# Altium PCB NFC.PcbDoc
Units mil, origin at the board's own origin, x right, y up, seen from the top; angles counter-clockwise.
Board outline 2130 x 3380 mil, 4 copper layers (Top Layer, Layer 1, Layer 2, Bottom Layer), stack 28.394 mil thick; 12 components, 11 nets, 35 pads, 7 vias.
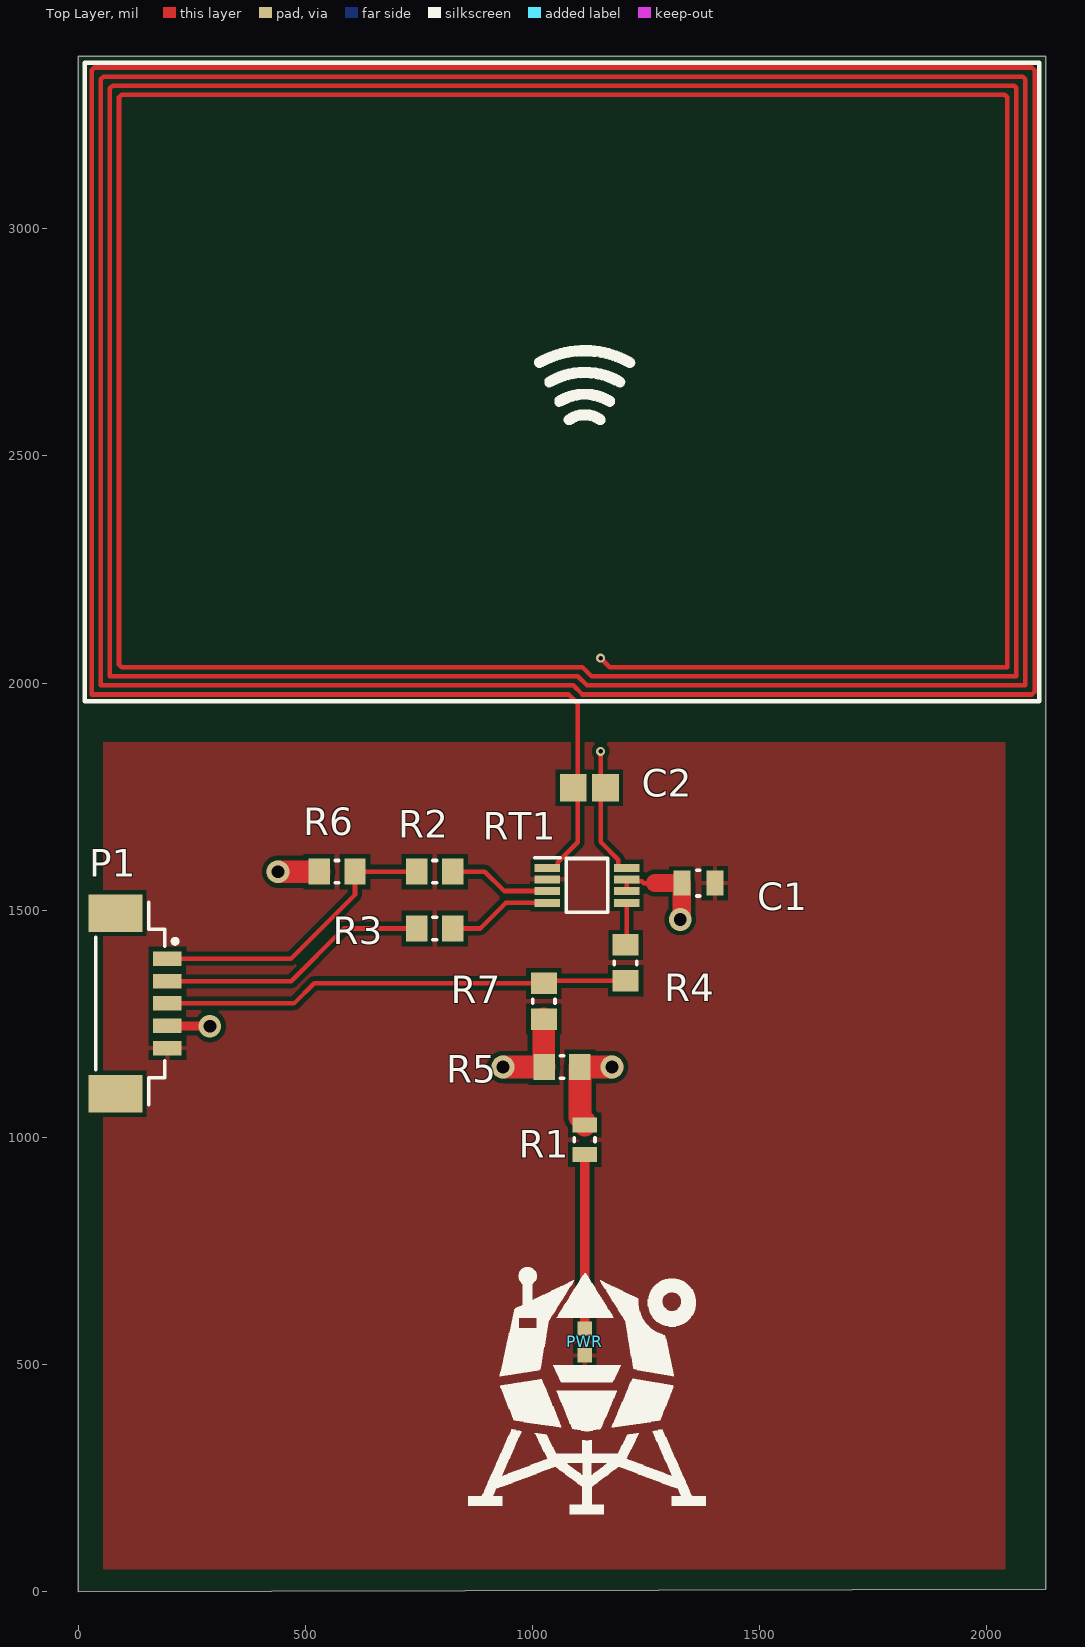
[diagram p0: Top Layer view]
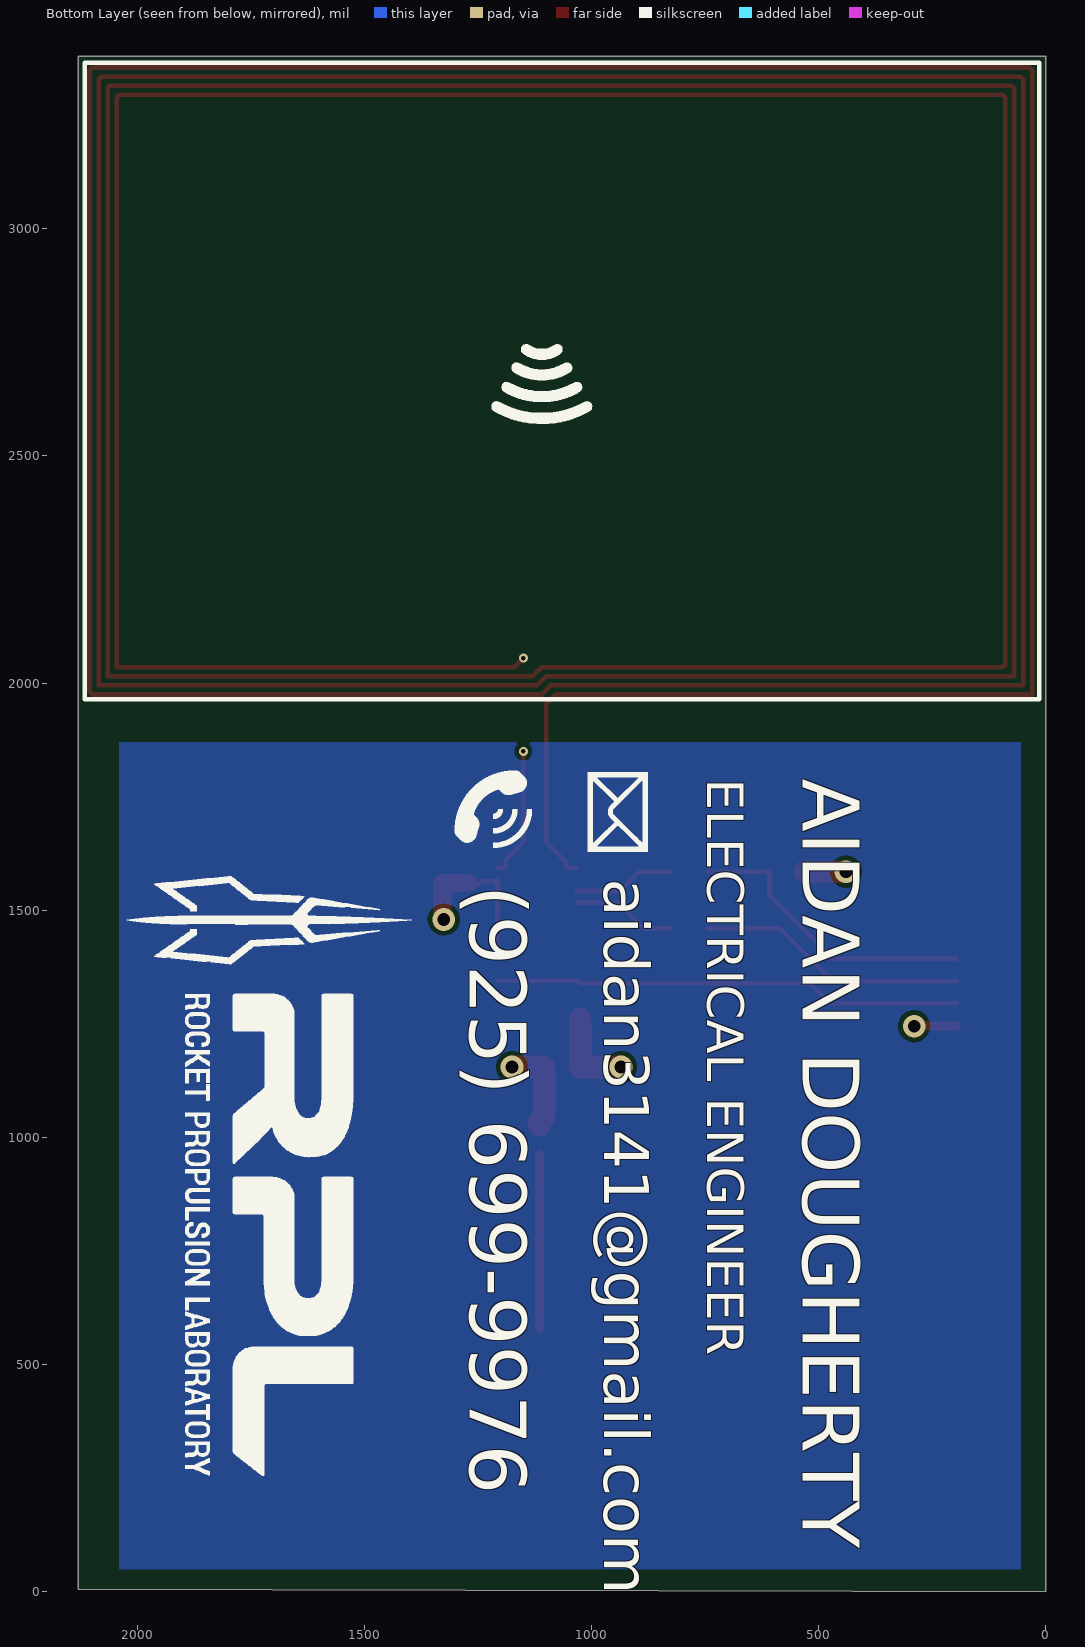
[diagram p1: Bottom Layer view, seen from below]
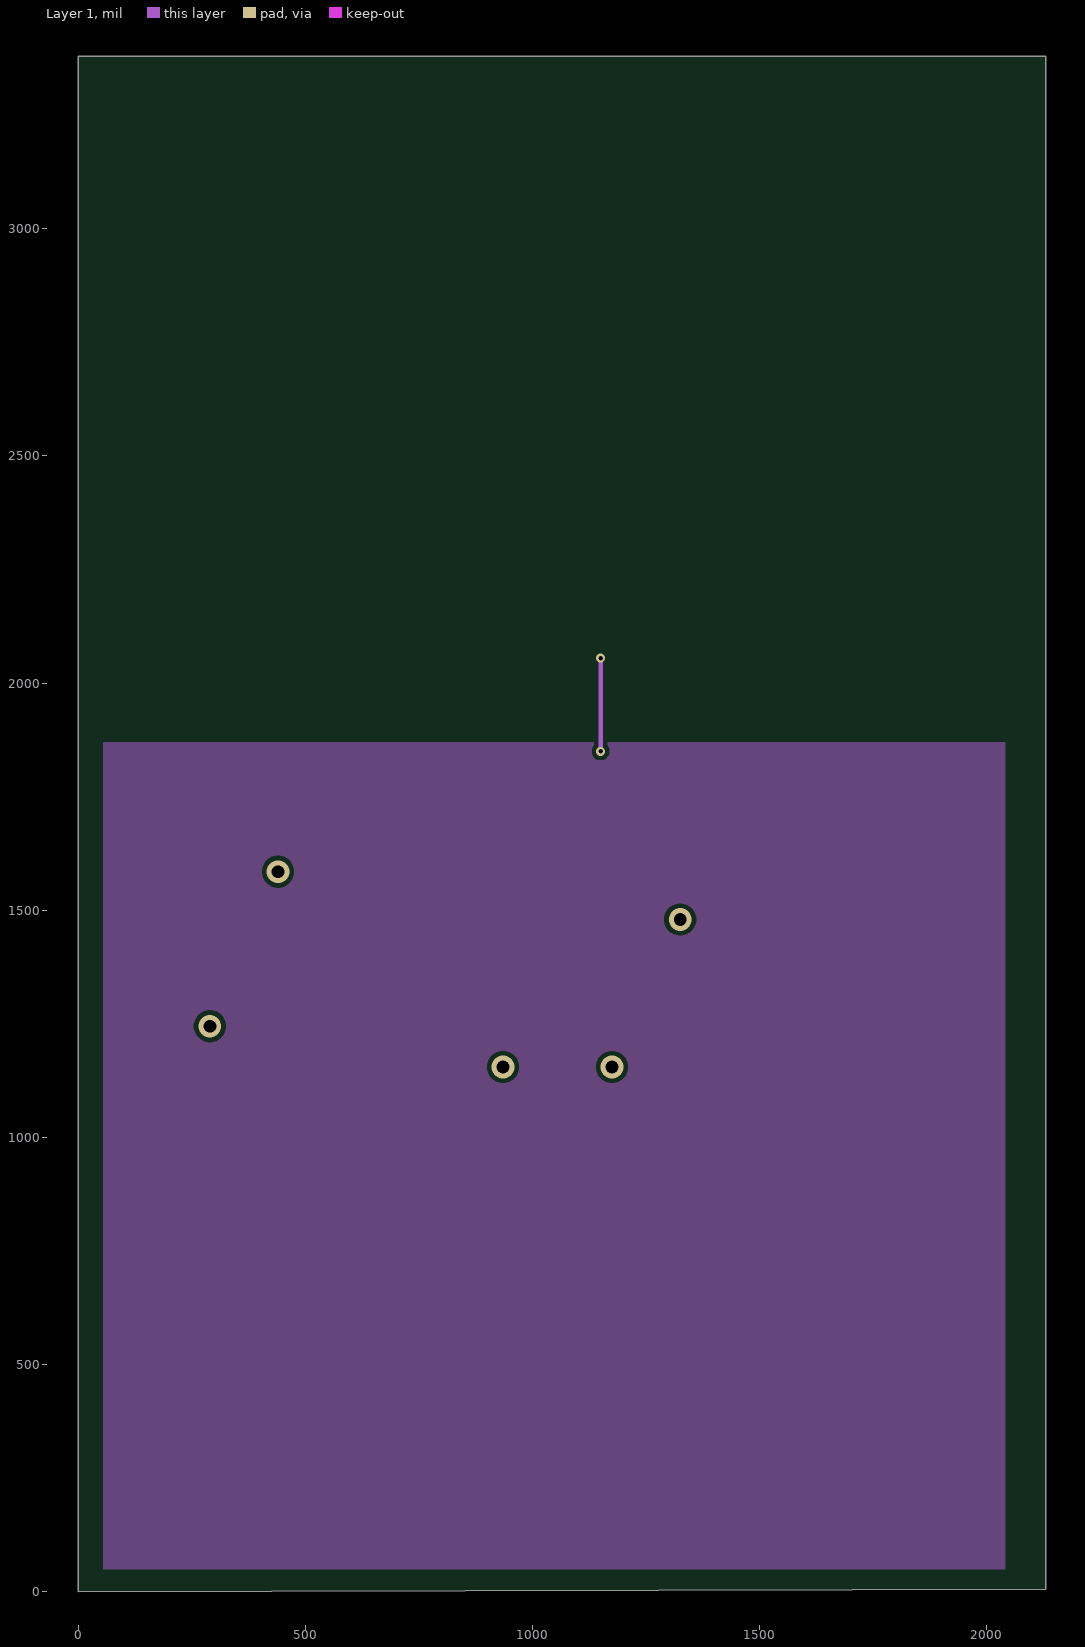
[diagram p2: Layer 1]
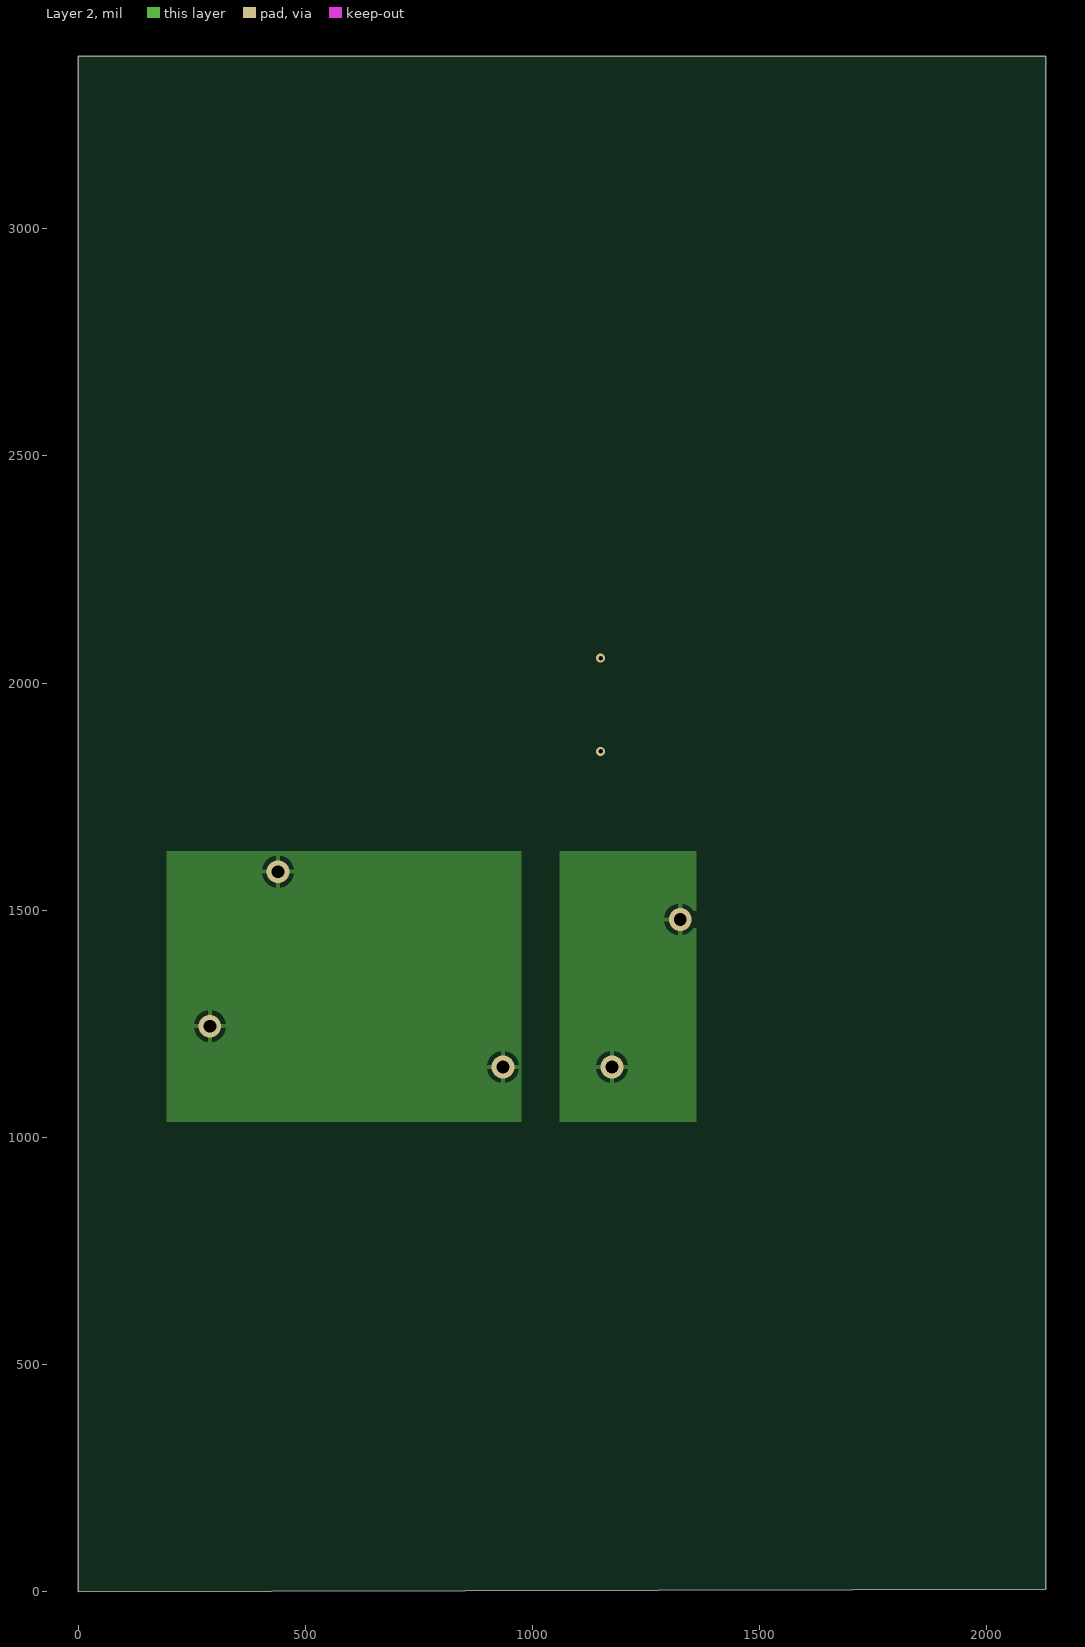
[diagram p3: Layer 2]
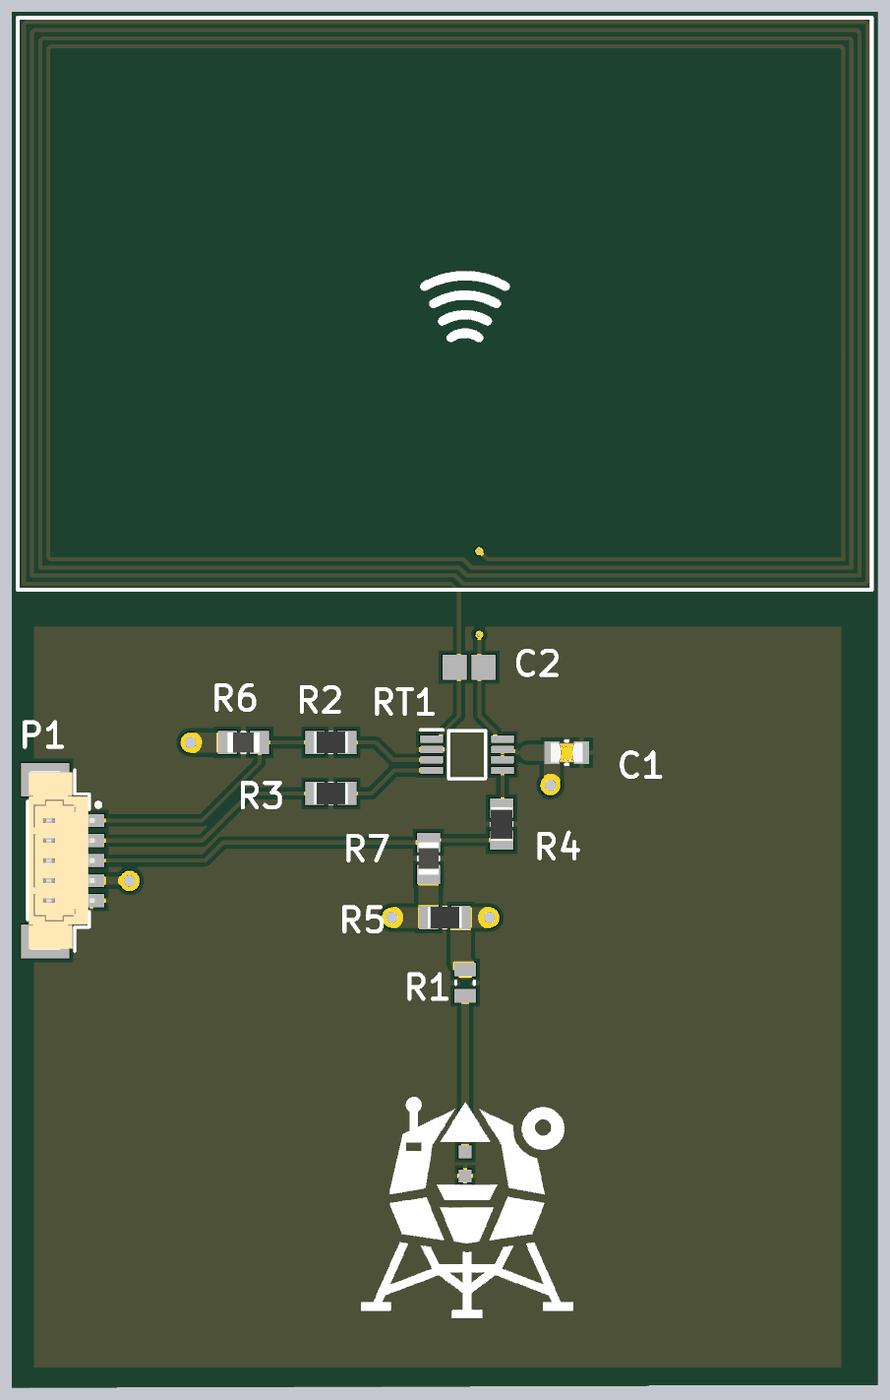
[diagram p4: 3D render of the assembled board from above, using the file's embedded part models]

## Layer stack, top to bottom
Top Solder: solder mask 0.8, Solder Resist, Dk 3.8
Top Layer: signal copper 1.378
Dielectric 2: prepreg 8.2835, JLC7628, Dk 4.6
Layer 1: signal copper 0.5984
Dielectric 1: dielectric 7.874, FR-4, Dk 4.8
Layer 2: signal copper 0.5984
Dielectric 3: prepreg 8.2835, JLC7628, Dk 4.6
Bottom Layer: signal copper 1.378
Bottom Solder: solder mask 0.8, Solder Resist, Dk 3.8

## Board outline
0,0 0,3380 2130,3380 2130,5.94

## Design rules (kind name [scope] priority, off if disabled: settings)
BoardOutlineClearance [All] p1: gap=7.87 ignorepadtopadclearanceinfootprint=FALSE
Clearance [All] p1: gap=4 ignorepadtopadclearanceinfootprint=FALSE except(5: Arc-Via Track-Via SMDPad-Via THPad-Via Via-Via Via-Fill Via-Poly Via-Region Via-Text; 9.84: Arc-Hole Track-Hole SMDPad-Hole THPad-Hole Via-Hole Fill-Hole Poly-Hole Region-Hole Text-Hole)
ComponentClearance [All] p1: gap=4 collisioncheckmode=3 verticalgap=4 showdistances=TRUE
DiffPairsRouting [All] p1: maxlimit=4 minlimit=4 mostfreqgap=4 toplayer_minwidth=4 toplayer_maxwidth=71497.94 toplayer_prefwidth=4 midlayer1_minwidth=4 midlayer1_maxwidth=71497.94 midlayer1_prefwidth=4 midlayer2_minwidth=4 midlayer2_maxwidth=71497.94 midlayer2_prefwidth=4 bottomlayer_minwidth=4 bottomlayer_maxwidth=71497.94 bottomlayer_prefwidth=4 maxuncoupledlength=500
Height [All] p1: minheight=0 maxheight=71497.94 prefheight=500
HoleSize [All] p1: absolutevalues=TRUE maxlimit=248.03 minlimit=7.87 maxpercent=80.000 minpercent=20.000
HoleToHoleClearance [All] p1: gap=9.84 allowstackedmicrovias=FALSE
MinimumAnnularRing [All] p1: minimumring=3
MinimumSolderMaskSliver [All] p1: minsoldermaskwidth=0
PlaneClearance [All] p1: clearance=4
PlaneConnect PlaneConnectPowerPads [InPadClass('PowerPads')] p1: planeconnectstyle=Direct reliefexpansion=20 reliefentries=4 reliefconductorwidth=10 reliefairgap=10
PlaneConnect [All] p2: pad.planeconnectstyle=Relief pad.reliefexpansion=11.81 pad.reliefentries=4 pad.reliefconductorwidth=4 pad.reliefairgap=4 via.planeconnectstyle=Direct via.reliefexpansion=11.81 via.reliefentries=4 via.reliefconductorwidth=5 via.reliefairgap=5
PolygonConnect PolygonConnectPowerPads [All vs (InPadClass('PowerPads'))] p1: connectstyle=Direct reliefconductorwidth=10 reliefentries=4 polygonreliefangle="90 Angle" airgapwidth=10
PolygonConnect [All] p2: thpad.connectstyle=Relief thpad.reliefconductorwidth=4 thpad.reliefentries=4 thpad.polygonreliefangle="90 Angle" thpad.airgapwidth=4 smdpad.connectstyle=Relief smdpad.reliefconductorwidth=4 smdpad.reliefentries=4 smdpad.polygonreliefangle="90 Angle" smdpad.airgapwidth=4 via.connectstyle=Direct via.reliefconductorwidth=5 via.reliefentries=4 via.polygonreliefangle="90 Angle" via.airgapwidth=5
RoutingVias [All] p1: holewidth=7.87 width=17.72 viastyle="Through Hole" minholewidth=7.87 minwidth=17.72 maxholewidth=248.03 maxwidth=257.87
SilkToSilkClearance [All] p1: silktosilkclearance=0
SilkToSolderMaskClearance [IsPad] p1: minsilkscreentomaskgap=4 clearancetoexposedcopper=TRUE
SolderMaskExpansion [All] p1: expansion=2.95 istentingtop=FALSE
Width [All] p1: maxlimit=71497.94 minlimit=4 preferedwidth=4
20 further rules are at their usual default settings.

## Components (designator, comment, footprint, x,y, rotation, side; value= is the part's Value field where it differs from the comment)
C1 "220nF" FP-CC0805-0_85-MFG 1365,1560 r0 top value="220 nF"
C2 "DNI" CAPC2013X140X50ML20T25 1125,1770 r0 top
P1 "653105124022" 653105124022 115,1295 r270 top
PWR "LTST-S270KGKT" AVAG-HSMX-C190_V 1115,550 r270 top
R1 "75R" RESC2013X50X30LL20T20 1115,995 r270 top
R2 "0R DNI" RESC2013X60X35ML10T20 785,1585 r180 top
R3 "RC0805JR-070RL" RESC2013X60X35ML10T20 785,1460 r180 top
R4 "RC0805JR-070RL" RESC2013X60X35ML10T20 1205,1384.37 r270 top
R5 "RC0805JR-070RL" RESC2013X60X35ML10T20 1065,1155 r180 top
R6 "4K7 0805" YAGO-RC0805_M 570,1585 r0 top
R7 "4K7 0805" YAGO-RC0805_M 1025,1300 r90 top
RT1 "NT3H1101W0FTTJ" SOP65P490X110-8N 1120,1555 r0 top

## Footprints (in the part's own frame and the unit in brackets; to place one, negate y for a bottom-side part, rotate by r counter-clockwise, add the part's x,y. Pads: shape width x height; smd on the part's side, far side on the other; paste and mask are expansions set on the pad)
653105124022 [mm] "1.25mm SMT Male Vertical Shrouded Header, 5p"
  rect 0.81x1.6 smd: 1(-2.5,2.07) 2(-1.25,2.07) 3(0,2.07) 4(1.25,2.07) 5(2.5,2.07)
  rect 2.1x3 smd: MP1(-5.05,-0.83) MP2(5.05,-0.83)
  silkscreen extent -5.65,-1.92 5.65,2.62, body extent -5.6,-1.85 5.6,2.36, height 4.74
AVAG-HSMX-C190_V [mm] "SMD, 2-Leads, Body 1.6x0.8mm, Height 0.9mm"
  rect 0.8x0.8 smd: 1(-0.75,0) 2(0.75,0)
  silkscreen extent 1.65,-0.4 1.65,0.4, body extent -0.8,-0.4 0.8,0.4, height 0.9
CAPC2013X140X50ML20T25 [mm] "Chip Capacitor, 2-Leads, Body 2.00x1.25mm, IPC Low Density"
  rect 1.5x1.55 smd: 1(-0.9,0) 2(0.9,0)
  body extent -1.1,-0.72 1.1,0.72, height 1.4
FP-CC0805-0_85-MFG [mm]
  rect 0.95x1.4 smd paste+0 mask+0: 1(-0.925,0) 2(0.925,0)
  silkscreen extent -0.08,-0.72 0.08,0.72, body extent -1.6,-1.05 1.6,1.05, height 0.25
RESC2013X50X30LL20T20 [mm] "Chip Resistor, 2-Leads, Body 2.00x1.25mm, IPC High Density"
  rect 0.85x1.35 smd: 1(-0.825,0) 2(0.825,0)
  silkscreen extent -0.1,-0.58 0.1,0.58, body extent -1.1,-0.72 1.1,0.72, height 0.5
RESC2013X60X35ML10T20 [mm] "Chip Resistor, 2-Leads, Body 2.1x1.35mm, IPC Low Density"
  rect 1.2x1.45 smd: 1(-1,0) 2(1,0)
  silkscreen extent -0.1,-0.63 0.1,0.63, body extent -1.05,-0.68 1.05,0.67, height 0.6
SOP65P490X110-8N [mm]
  rect 1.425x0.45 smd: 1(-2.212,0.975) 2(-2.212,0.325) 3(-2.212,-0.325) 4(-2.212,-0.975) 5(2.212,-0.975) 6(2.212,-0.325) 7(2.212,0.325) 8(2.212,0.975)
  silkscreen extent -2.93,-1.5 1.15,1.55, body extent -2.45,-1.5 2.45,1.5, height 1.1
YAGO-RC0805_M [mm] "Chip Resistor, 2-Leads, Body 2.00x1.25mm, IPC Low Density"
  rect 1.2x1.45 smd: 1(-1,0) 2(1,0)
  silkscreen extent -0.1,-0.63 0.1,0.63, body extent -1,-0.62 1,0.63, height 0.6

## Part data
C1: library part CMP-03422-000685-1, "CAP CER 0.22UF 16V X7R 0805", Capacitance="220 nF", Manufacturer=Yageo, Manufacturer Part Number=CC0805KRX7R7BB224, Package=CC0805-0.85, Temperature="-30°C to +85°C", Temperature Characteristic=X7R, Temperature Range High=+85°C, Temperature Range Low=-30°C, Tolerance=0.1, Voltage Rating="16 V", Automotive=No, Category=Cap, ComponentLink2Description=Datasheet, ComponentLink2URL=http://www.yageo.com/documents/recent/UPY-GPHC_Y5V_6.3V-to-50V_8.pdf, Device Class L1="Passive Components", Device Class L2=Capacitors, Device Class L3="Ceramic Capacitors", Digikey Description="CAP CER 0.22UF 16V X7R 0805", Footprint Url=http://www.yageo.com/exep/pages/download/literatures/UPY-C_GEN_24.pdf, Height=0.95mm, Ipc Land Pattern Name=CAPC200125X85, Lead Free=Yes, Material=Ceramic, Mouser Description="Multilayer Ceramic Capacitors MLCC - SMD/SMT 220nF 16V X7R 10%", Octopart=https://octopart.com/cc0805krx7r7bb224-yageo-8376564, RoHS=TRUE
C2: library part CMP-2007-04534-1, Manufacturer="AVX Interconnect / Elco", Part Number=08051A1R0CAT2A
P1: library part CMP-1502-00760-1, "Male Shrouded Header WR-WTB, SMT, Vertical, pitch 1.25 mm, 1 x 5 position", Contact Resistance=20mOhm, Manufacturer="Wurth Elektronik", Operating Temperature=-40to85degC, Working Voltage=125VAC, Datasheet URL=https://katalog.we-online.de/em/datasheet/6531xx124022.pdf, Gender=Male, Manufacturer URL=http://www.we-online.de, Mounting Technology=SMT, Orientation=Vertical, Package Reference=653105124022, Packaging=TapeandReel, Part Number=653105124022, Pitch=1.25mm, Position=1x5, Publisher=WurthElektronik
PWR: library part CMP-1744-00003-1, "LED Uni-Color Yellow, 65 mW, 20 mA, -40 to 85 degC, 2-Pin SMD, RoHS, Tape and Reel", Case Code (Imperial)=0603, Case Code (Metric)=1608, Max Operating Temperature="155 degC", Min Operating Temperature="-55 degC", Package Quantity=5000, Power Rating="100 mW", Resistance="390 Ohm", Tolerance=1%, Voltage Rating="50 V", Case\Package=0603, ComponentLink1Description="Manufacturer URL", ComponentLink1URL=http://www.avagotech.com/, ComponentLink2Description=Datasheet, ComponentLink2URL=http://docs.avagotech.com/docs/AV02-0551EN, ComponentLink3Description="Package Specification", ComponentLink3URL=http://www.fairchildsemi.com/dwg/MA/MA03D.pdf, DatasheetVersion=Mar-12, Height="0.45 mm", Length="1.6 mm", Mount="Surface Mount", PackageDescription="2-Pin Surface Mount Device, Body 1.6 x 0.8 mm, Height 0.9 mm", PackageReference=HSMX-C190, Packaging="Tape and Reel", Pins=2, REACH SVHC="No SVHC", RoHSCompliant=true, Voltage Rating (DC)="50 V", Width="0.8 mm"
R1: library part CMP-2001-04896-1, Manufacturer="Vishay Dale", Part Number=CRCW08050000Z0EA
R2 R3 R4 R5: library part CMP-2100-03673-1, "Chip Resistor, 0 Ohm, Jumper, +/- 5%, 0.125 W, -55 to 155 degC, 0805 (2012 Metric), RoHS, Tape and Reel", Case Code (Imperial)=0805, Case Code (Metric)=2012, Manufacturer=Yageo, Max Operating Temperature=155degC, Min Operating Temperature=-55degC, Package Description="2-Pin Surface Mounted Device, Body 2 x 1.25 mm", Power Rating=125mW, Resistance=0mOhm, Temperature Coefficient=200ppm/degreesC, Tolerance=5%, Voltage Rating=150V, Case/Package=0805, Composition=ThickFilm, Contact Plating=Tin, Datasheet URL=http://www.yageo.com/NewPortal/yageodocoutput?fileName=/pdf/R-Chip/PYu-RC_Group_51_RoHS_L_5.pdf, Datasheet Version="Rev. 5, 10/2016", Depth=1.25mm, Height=0.5mm, Lead Free=LeadFree, Length=2mm, Manufacturer URL=http://www.yageo.com/, Military Standard=Not, Number of Pins=2, Package Reference=0805, Packaging=TapeandReel, Radiation Hardening=No, REACH SVHC=Unknown, RoHSCompliant=true, Termination=SMD/SMT, Voltage Rating (DC)=150V, Width=1.25mm
R6 R7: library part CMP-1568-00001-1, "General Puprose Chip Resistor, 4700 Ohm +/- 1%, 0.125 W, -55 to 155 degC, 2-Pin SMD, RoHS, Tape and Reel", PartNumber=RC0805FR-074K7L, Power="0.125 W", Resistance="4700 Ohm", Temperature Max="155 degC", Temperature Min="-55 degC", Tolerance="+/- 1%", ComponentLink1Description="Manufacturer URL", ComponentLink1URL=http://www.yageo.com/NewPortal/_en/index.jsp, ComponentLink2Description=Datasheet, ComponentLink2URL=http://www.yageo.com/documents/recent/PYu-RC_Group_51_RoHS_L-3.pdf, DatasheetVersion="Rev. 3", Mounting Technology="Surface Mount", PackageDescription="2-Pin Surface Mount Device, Body 2 x 1.25 mm", Packing="Tape and Reel", RoHS=TRUE
RT1: "Thermistor", Manufacturer_Name=NXP, Mouser Part Number=771-NT3H1101W0FTTJ, Arrow Part Number=NT3H1101W0FTTJ, Arrow Price/Stock=https://www.arrow.com/en/products/nt3h1101w0fttj/nxp-semiconductors?region=nac, Datasheet Link=https://ms.componentsearchengine.com/Datasheets/2/NT3H1101W0FTTJ.pdf, Height=1.1mm, Manufacturer_Part_Number=NT3H1101W0FTTJ, Mouser Price/Stock=https://www.mouser.co.uk/ProductDetail/NXP-Semiconductors/NT3H1101W0FTTJ?qs=d7b8vw%252BBfo2DKYkZh36fFg%3D%3D

## Via types
v1: diameter 50, hole 28, Top Layer to Bottom Layer, 5 vias
v2: diameter 20, hole 10, Top Layer to Bottom Layer, 2 vias

## Nets (pads, with @x,y where several pads share a name; then routed paths per layer and width w, separated by ;. In a path a pad name is that pad's centre, name@x,y a point inside that pad or via, vN(x,y) a via of type N, cw(c..) or ccw(c..) an arc to the next point about the centre after c; other vN are vias at no path point)
3V2_VOUT: C1.1 R1.1 R5.1 RT1.6 RT1.7 | length 434.4
  Top Layer w10: RT1.6 RT1.7 1210.94,1563.94 1241.06,1563.94 1245,1560 1270,1560
  Top Layer w40: 1270,1560 C1.1 1328.58,1486.29 1325,1482.71 v1(1325,1480)
  Top Layer w50: R1.1 1115,1034.17 1104.37,1044.8 R5.1 v1(1175,1155)
3V3_EXT: P1.4 R5.2 R6.1 R7.1 | length 381
  Top Layer w20: P1.4 289.21,1245.79 v1(290,1245)
  Top Layer w50: v1(440,1585) R6.1 ; v1(935,1155) R5.2 1025,1155.63 R7.1
FD: R3.1 RT1.4 | length 232
  Top Layer w10: R3.1 885,1460 941.61,1516.61 RT1.4
FD_DBG: P1.2 R3.2 | length 597.1
  Top Layer w10: P1.2 469.21,1344.21 585,1460 R3.2
GND: C1.2 P1.5 PWR.2 RT1.2
NetPWR_1: PWR.1 R1.2 | length 383
  Top Layer w20: PWR.1 R1.2
NFC_ANT: C2.1 C2.2 RT1.1 RT1.8 | length 27531.8
  Top Layer w10: RT1.1 1052.11,1593.39 1055.96,1597.24 1055.96,1605.96 1100,1650 1100,1675 1100,1770 1100,1955 1080,1975 30,1975 30,3349.14 35.86,3355 2099.14,3355 2105,3349.14 2105,1980.86 2099.14,1975 1110,1975 1090,1995 50,1995 50,3329.14 55.86,3335 2079.14,3335 2085,3329.14 2085,1995 1120,1995 1100,2015 70,2015 70,3309.14 75.86,3315 2060,3315 2065,3310 2065,2015 1130,2015 1110,2035 95.86,2035 90,2040.86 90,3289.14 95.86,3295 2039.14,3295 2045,3289.14 2045,2035 1170,2035 v2(1150,2055) ; v2(1150,1850) 1150,1650.47 1189.09,1611.39 1189.09,1597.24 1192.94,1593.39 RT1.8
  Layer 1 w10: v2(1150,1850) v2(1150,2055)
SCL: R2.1 RT1.3 | length 226.3
  Top Layer w10: R2.1 895,1585 937.5,1542.5 1032.62,1542.5 RT1.3
SCL_DBG: P1.1 R2.2 R6.2 | length 658.1
  Top Layer w10: P1.1 468.43,1393.43 609.37,1534.37 R6.2 R2.2
SDA: R4.1 RT1.5 | length 93.7
  Top Layer w10: R4.1 1207.09,1425.83 RT1.5
SDA_DBG: P1.3 R4.2 R7.2 | length 1029.2
  Top Layer w10: P1.3 475,1295 519.37,1339.37 R7.2 1030.63,1345 R4.2
pads on no net: P1.MP1 P1.MP2

## Polygon pours and split planes (outlines as drawn)
3V2_VOUT on Layer 2 "3V2_VOUT_L2" (solid, pour order 3): 1060,1035 1360,1035 1360,1630 1060,1630 1060,1225
3V3_EXT on Layer 2 "3V3_EXT_L2" (solid, pour order 2): 195,1630 975,1630 975,1035 195,1035
GND on Top Layer "GNDTOP" (solid, pour order 0): 55,1870 2040,1870 2040,50 55,50
GND on Layer 1 "GND_L02_P001" (solid, pour order 1): 55,1870 2040,1870 2040,50 55,50
GND on Bottom Layer "GND_L04_P004" (solid, pour order 4): 55,1870 2040,1870 2040,50 55,50

## Silkscreen, mask and mechanical layers (free items; w line width, h text height)
Top Overlay:
  drawing of 17 lines, arcs and shapes, not listed
Bottom Overlay:
  drawing of 45 lines, arcs and shapes, not listed
  text "AIDAN DOUGHERTY" at 535,1790 h125 r90
  text "ELECTRICAL ENGINEER" at 745,1790 h80 r90
  text "aidan3141@gmail.com" at 971.67,1570 h100 r90
  text "(925) 699-9976" at 1268.34,1555 h125 r90
Mechanical 1:
  lines w10: 0,0 5,5 2130,5 2130,3380 0,3380 0,0